# Altium PCB ATRACK_PILOT_V2.PcbDoc
Units mil, origin at the board's own origin, x right, y up, seen from the top; angles counter-clockwise.
Board outline 1732.28 x 1397.64 mil, 2 copper layers (Top Layer, Bottom Layer); 29 components, 25 nets, 106 pads, 26 vias.
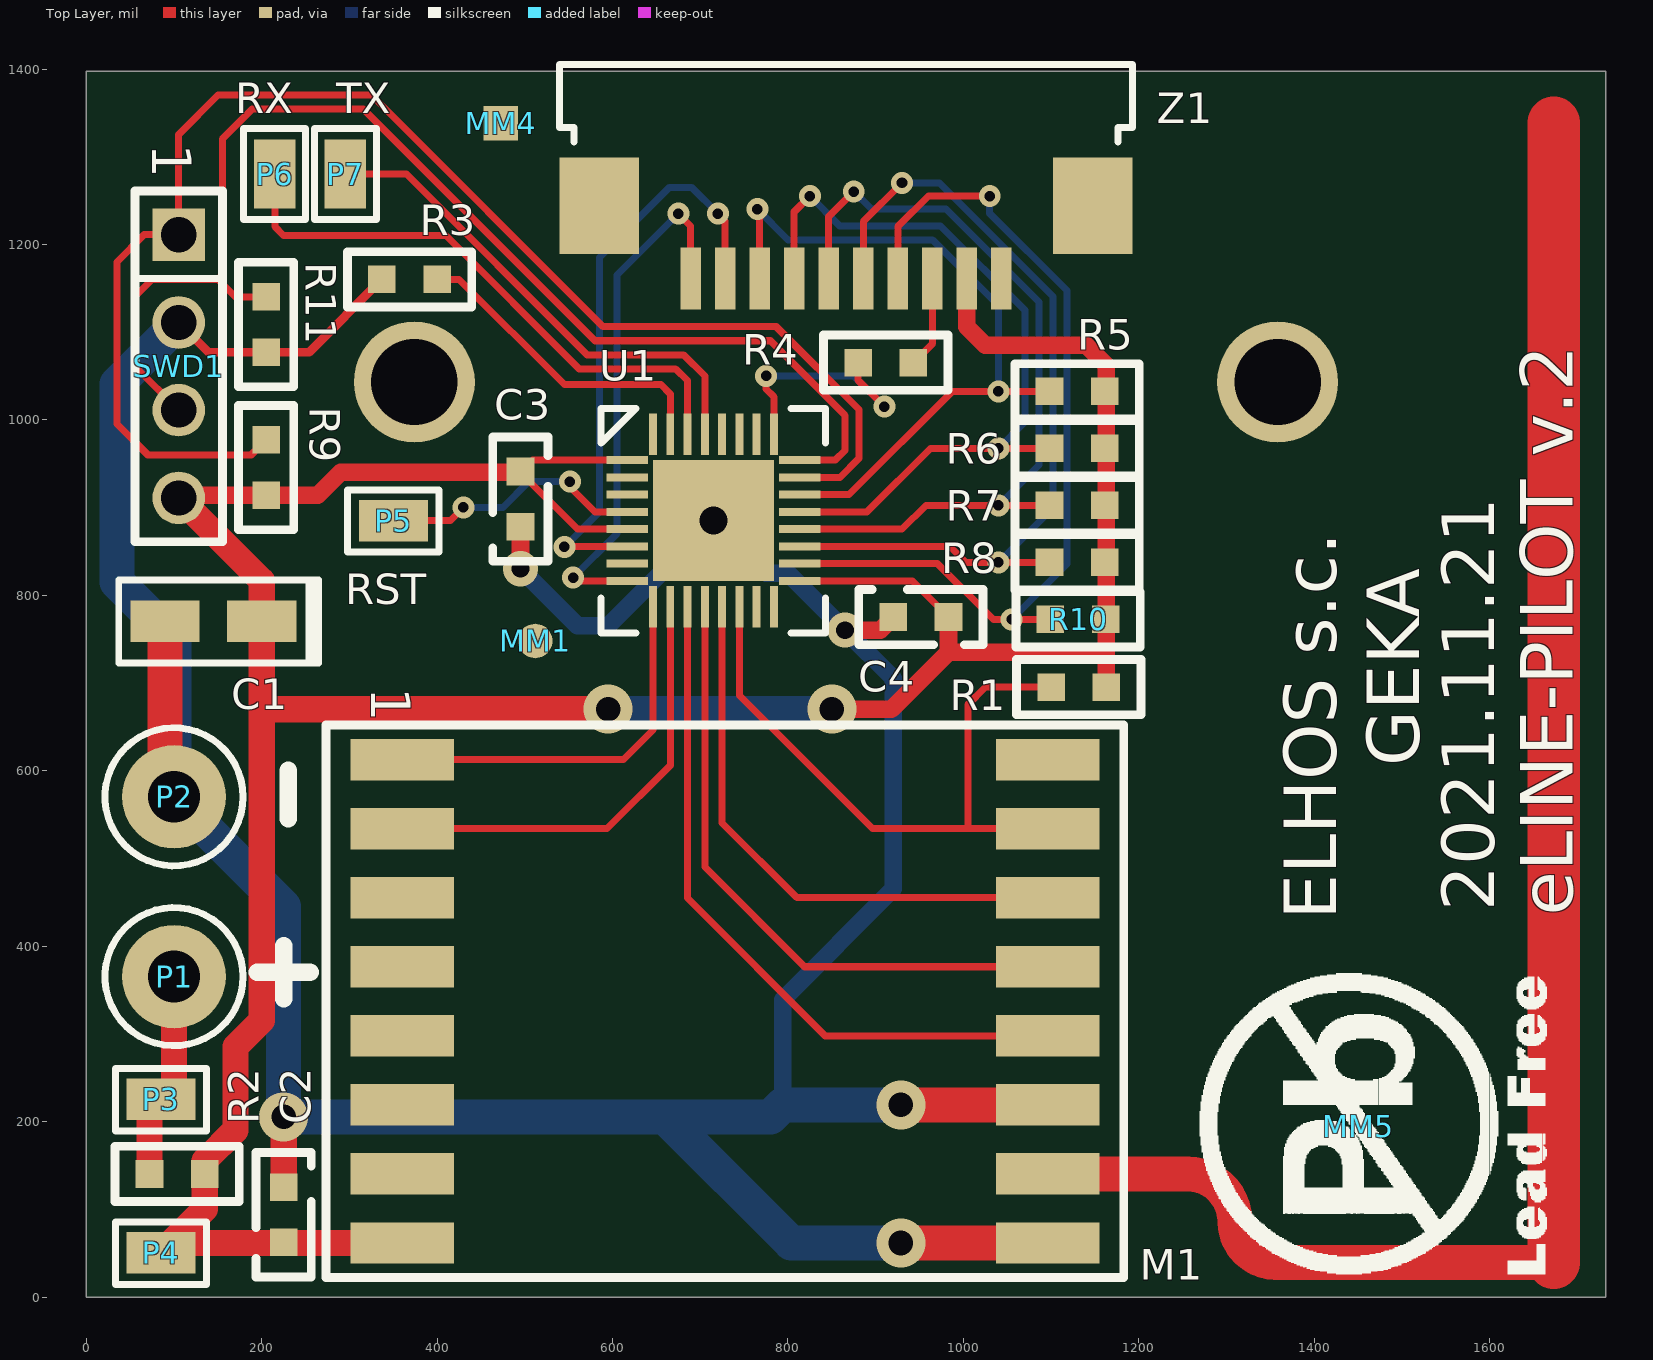
[diagram p0: Top Layer view]
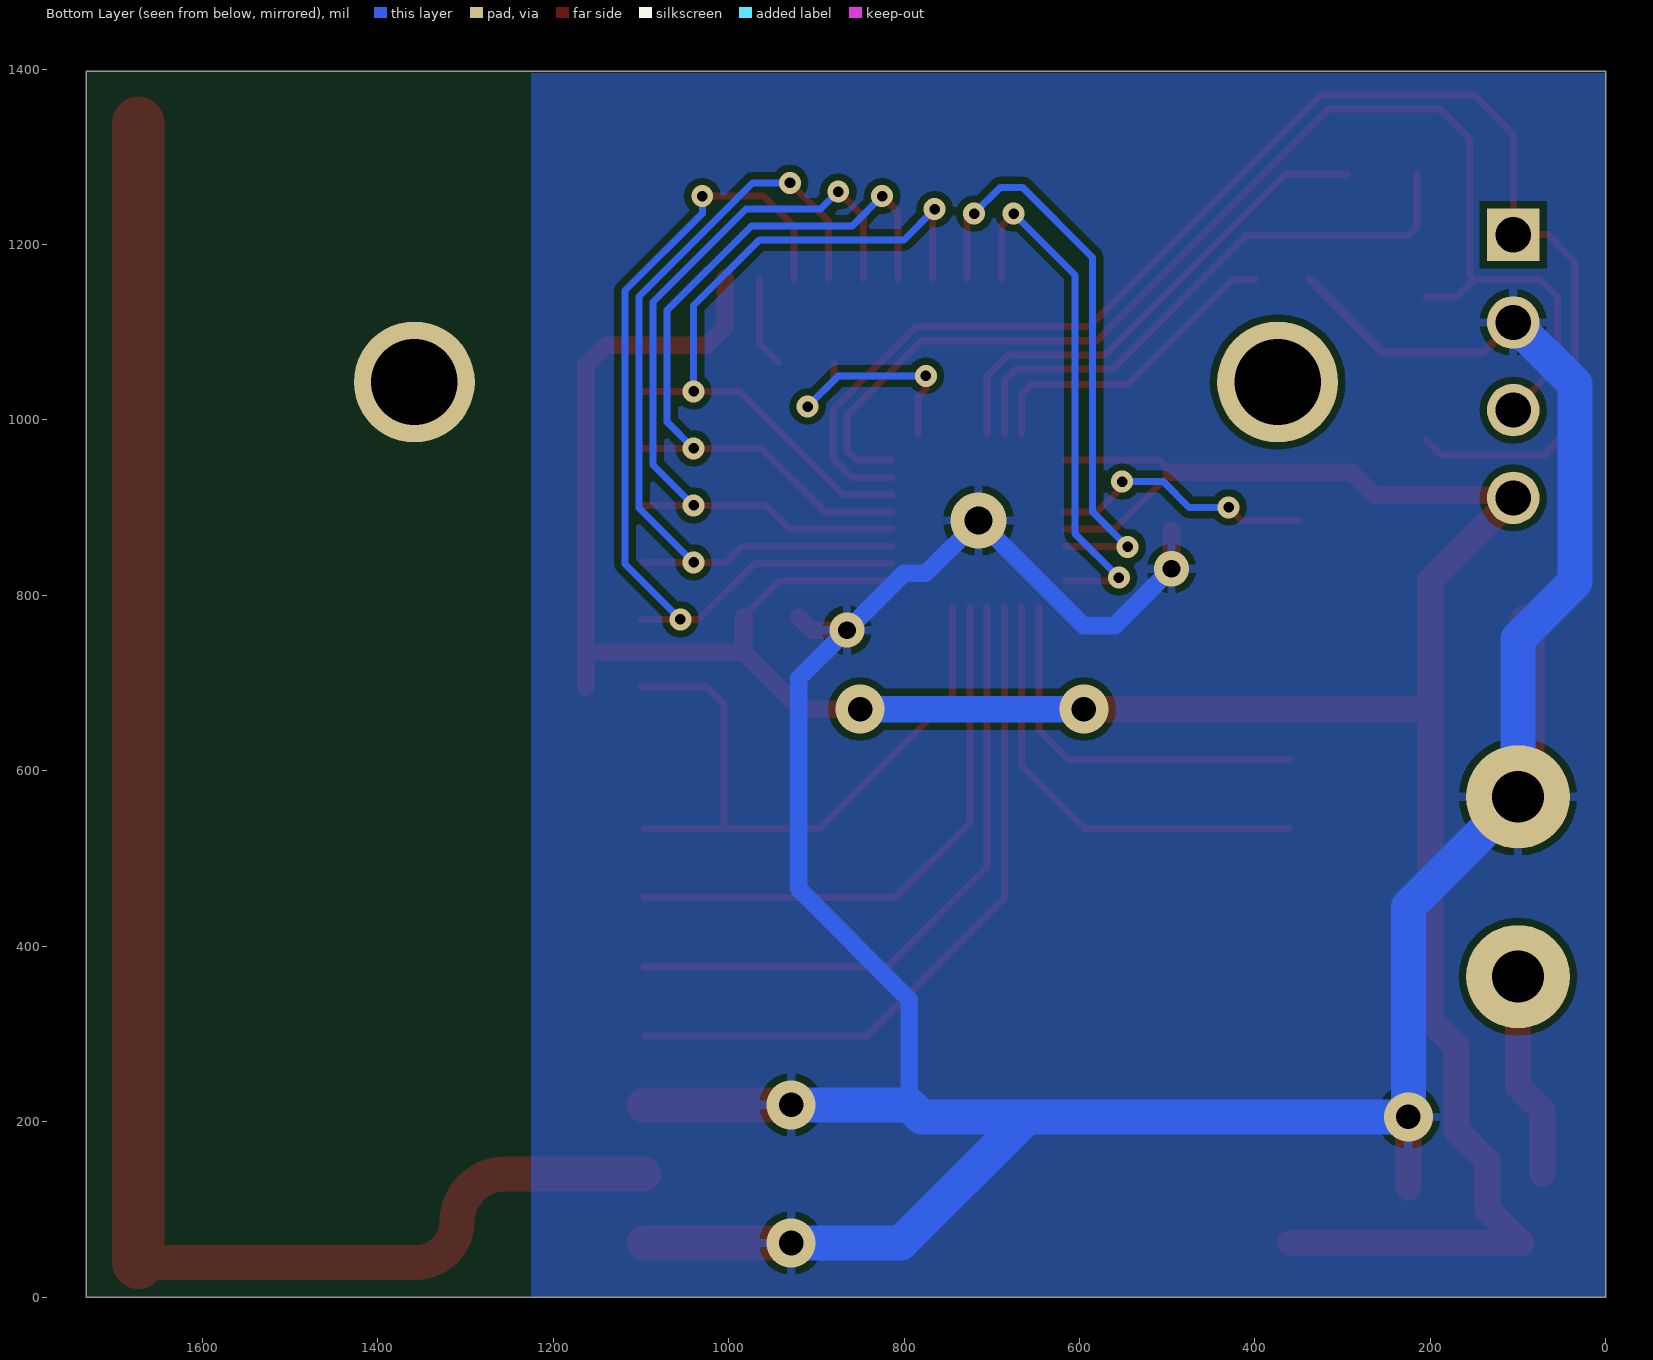
[diagram p1: Bottom Layer view, seen from below]

## Layer stack, top to bottom
Top Layer: signal copper 1.4
Dielectric: dielectric 12.6, FR-4, Dk 4.8
Bottom Layer: signal copper 1.4

## Board outline
0,0 0,1397.64 1732.28,1397.64 1732.28,0

## Design rules (kind name [scope] priority, off if disabled: settings)
Clearance [All] p1: gap=8
ComponentClearance [All] p1 off: gap=10 collisioncheckmode=3 verticalgap=10 showdistances=FALSE
HoleSize [All] p1: absolutevalues=TRUE maxlimit=157.48 minlimit=11.81 maxpercent=80.000 minpercent=20.000
MinimumSolderMaskSliver [All] p1: minsoldermaskwidth=4
PolygonConnect [All] p1: connectstyle=Relief reliefconductorwidth=10 reliefentries=4 polygonreliefangle="90 Angle"
RoutingVias [All] p1: holewidth=19.68 width=40 viastyle="Through Hole" minholewidth=11.81 minwidth=25 maxholewidth=78.74 maxwidth=200
SilkToSilkClearance [All] p1: silktosilkclearance=4
SilkscreenOverComponentPads [All] p1: minsilkscreentomaskgap=4
SolderMaskExpansion [All] p1: expansion=4
Width [All] p1: maxlimit=100 minlimit=8 preferedwidth=10 minimp=50.000000 maximp=50.000000 favimp=50.000000
23 further rules are at their usual default settings.

## Components (designator, comment, footprint, x,y, rotation, side; value= is the part's Value field where it differs from the comment)
C1 "10u/6.3V" CAP_A 89.76,770.35 r0 top
C2 "100n" 0603C 225,129.29 r90 top
C3 "100n" 0603C 495,874.29 r270 top
C4 "100n" 0603C 916.06,775.35 r180 top
M1 "RFM69W" RFM69W 340.32,22.28 r0 top locked
MM1 "" REF_CIR 511.81,748.03 r0 top
MM4 "" REF_SQR 472.44,1338.58 r0 top
MM5 "" PB_FREE_GRAF 1450,195 r90 top
P1 "PIN" PP_PICO6 100,365.35 r0 top
P2 "PIN" PP_PICO6 100,570.35 r0 top
P3 "PIN_M" PP_SMD1 85,225.35 r0 top
P4 "PIN_M" PP_SMD1 85,50.35 r0 top
P5 "PIN_M" PP_SMD1 350,885.35 r0 top
P6 "PIN_M" PP_SMD1 215,1280.35 r270 top
P7 "PIN_M" PP_SMD1 295,1280.35 r90 top
R1 "10k" 0603R 1096.06,695.35 r180 top
R2 "1R" 0603R 138.94,140.35 r0 top
R3 "10k" 0603R 333.07,1160.35 r180 top
R4 "1k" 0603R 876.06,1065.35 r180 top
R5 "100k" 0603R 1165.08,1032.64 r0 top
R6 "100k" 0603R 1165.08,967.64 r0 top
R7 "100k" 0603R 1165.08,902.64 r0 top
R8 "100k" 0603R 1165.08,837.64 r0 top
R9 "10k" 0603R 205,910.35 r270 top
R10 "100k" 0603R 1166.14,772.64 r0 top
R11 "10k" 0603R 205,1073.43 r270 top
SWD1 "ST-LINK" PIN4 105.35,1211.22 r270 top
U1 "STM32L031xx" UFQFPN32 616.57,983.78 r270 top
Z1 "Header 10" MX-52271-2079 688.98,1161.42 r0 top locked

## Footprints (in the part's own frame and the unit in brackets; to place one, negate y for a bottom-side part, rotate by r counter-clockwise, add the part's x,y. Pads: shape width x height; smd on the part's side, far side on the other; paste and mask are expansions set on the pad)
0603C [mm]
  rect 0.8x0.8 smd: 1(-0.1,0) 2(-1.7,0)
  silkscreen extent -2.7,-0.8 0.9,0.8
0603R [mm]
  rect 0.8x0.8 smd: 1(-0.1,0) 2(-1.7,0)
  silkscreen extent -2.7,-0.8 0.9,0.8
CAP_A [mm]
  rect 2x1.2 smd: 1(0,0) 2(2.8,0)
  silkscreen extent -1.34,-1.2 4.45,1.2
MX-52271-2079 [mm]
  rect 2.3x2.8 smd: 0(-2.65,2.1) 0(11.65,2.1)
  rect 0.6x1.8 smd: 1(0,0) 2(1,0) 3(2,0) 4(3,0) 5(4,0) 6(5,0) 7(6,0) 8(7,0) 9(8,0) 10(9,0)
  silkscreen extent -3.8,3.95 12.8,6.2
PB_FREE_GRAF [mil]
  silkscreen extent -169,-215 174,181
PIN4 [mil]
  rect 60x60 hole 40: 1(0,0)
  round 60 hole 40: 2(100,0) 3(200,0) 4(300,0)
  silkscreen extent -50,-50 350,50
PP_PICO6 [mm]
  round 3 hole 1.5: 1(0,0)
  silkscreen extent -2,-2 2,2
PP_SMD1 [mm]
  rect 2x1.2 smd: 1(0,0)
  silkscreen extent -1.32,-0.91 1.32,0.89
REF_CIR [mm]
  round 1 smd paste-0.5 mask+0.5: 0(0,0)
REF_SQR [mm]
  rect 1x1 smd paste-0.5 mask+0.5: ""(0,0)
RFM69W [mm]
  rect 3x1.2 smd: 1(0.5,15) 2(0.5,13) 3(0.5,11) 4(0.5,9) 5(0.5,7) 6(0.5,5) 7(0.5,3) 8(0.5,1) 9(19.2,1) 10(19.2,3) 11(19.2,5) 12(19.2,7) 13(19.2,9) 14(19.2,11) 15(19.2,13) 16(19.2,15)
  silkscreen extent -1.7,0 21.4,16
UFQFPN32 [mm]
  rect 0.23x1.2 smd mask+0.152: 1(0.75,0) 2(1.25,0) 3(1.75,0) 4(2.25,0) 5(2.75,0) 6(3.25,0) 7(3.75,0) 8(4.25,0) 17(4.25,5) 18(3.75,5) 19(3.25,5) 20(2.75,5) 21(2.25,5) 22(1.75,5) 23(1.25,5) 24(0.75,5)
  rect 1.2x0.23 smd mask+0.152: 9(5,0.75) 10(5,1.25) 11(5,1.75) 12(5,2.25) 13(5,2.75) 14(5,3.25) 15(5,3.75) 16(5,4.25) 25(0,4.25) 26(0,3.75) 27(0,3.25) 28(0,2.75) 29(0,2.25) 30(0,1.75) 31(0,1.25) 32(0,0.75)
  rect 3.5x3.5 smd mask+0.203: 33(2.5,2.5)
  silkscreen extent -0.75,-0.75 5.75,5.75

## Part data
C1: library part CAP_TANTAL_SMD, "KONDENSATOR ELEKTROLITYCZNY TANTALOWY SMD"
C2 C3 C4: library part CAP, "Capacitor"
M1: library part RFM96W
MM1 MM4 MM5: library part MECH
R1 R2 R3 R4 R5 R6 R7 R8 R9 R10 R11: library part RES3
SWD1: library part SW_CON, "Header, 4-Pin"
U1: library part STM32L031xx/UFQFPN32
Z1: "Header, 10-Pin"

## Free pads (board coordinates)
  round 137.8 hole 98.43: 0(374.02,1043.31) 1(1358.27,1043.31)

## Via types
v1: diameter 25, hole 12, Top Layer to Bottom Layer, tented both sides, 18 vias
v2: diameter 56, hole 28, Top Layer to Bottom Layer, tented both sides, 5 vias
v3: diameter 40, hole 20, Top Layer to Bottom Layer, tented both sides, 2 vias
v4: diameter 64, hole 32, Top Layer to Bottom Layer, tented both sides, 1 vias

## Nets (pads, with @x,y where several pads share a name; then routed paths per layer and width w, separated by ;. In a path a pad name is that pad's centre, name@x,y a point inside that pad or via, vN(x,y) a via of type N, cw(c..) or ccw(c..) an arc to the next point about the centre after c; other vN are vias at no path point)
#RST: P5.1 U1.4 | length 302.6
  Top Layer w8: P5.1 415,885.35 v1(430,900.35) ; v1(551.25,929.75) 555,926 555,920.35 580.16,895.2 U1.4
  Bottom Layer w8: v1(430,900.35) 475,900.35 504.4,929.75 v1(551.25,929.75)
ANT: M1.10 | length 1933.9
  Top Layer w40: M1.10 1255.57,140.39 cw(c1255.57,86.51) 1309.45,86.51 ccw(c1356.59,86.51) 1356.59,39.37 1673.23,39.37
  Top Layer w60: 1673.23,39.37 1673.23,1338.58
COL1: R5.2 U1.22 Z1.3 | length 831.8
  Top Layer w8: v1(765,1240.35) 767.72,1237.64 Z1.3 ; U1.22 869.53,914.88 987.28,1032.64 v1(1040,1032.64) R5.2
  Bottom Layer w8: v1(765,1240.35) 800,1205.35 965,1205.35 1040,1130.35 v1(1040,1032.64)
COL2: R6.2 U1.21 Z1.4 | length 885.1
  Top Layer w8: Z1.4 807.09,1237.44 v1(825,1255.35) ; U1.21 889.84,895.2 962.28,967.64 v1(1040,967.64) R6.2
  Bottom Layer w8: v1(825,1255.35) 859,1221.35 974,1221.35 1070,1125.35 1070,997.64 v1(1040,967.64)
COL3: R7.2 U1.20 Z1.5 | length 920.7
  Top Layer w8: U1.20 930.16,875.51 957.28,902.64 v1(1040,902.64) R7.2 ; Z1.5 846.46,1231.81 v1(875,1260.35)
  Bottom Layer w8: v1(875,1260.35) 895,1240.35 980,1240.35 1086,1134.35 1086,948.64 v1(1040,902.64)
COL4: R8.2 U1.19 Z1.6 | length 974.1
  Top Layer w8: U1.19 984.53,855.83 1002.72,837.64 v1(1040,837.64) R8.2 ; Z1.6 885.83,1226.18 v1(930,1270.35)
  Bottom Layer w8: v1(930,1270.35) 972.63,1270.35 1102,1140.98 1102,899.64 v1(1040,837.64)
COL5: R10.2 U1.18 Z1.7 | length 1035.7
  Top Layer w8: U1.18 970.67,836.14 1034.18,772.64 v1(1055,772.64) R10.2 ; Z1.7 925.2,1220.55 960,1255.35 v1(1030,1255.35)
  Bottom Layer w8: v1(1030,1255.35) 1030,1235.61 1118,1147.61 1118,835.64 v1(1055,772.64)
DRX: P6.1 U1.30 | length 664.3
  Top Layer w8: P6.1 215,1220.35 225,1210.35 410,1210.35 562,1058.35 672,1058.35 685.47,1044.88 U1.30
DTX: P7.1 U1.29 | length 571.9
  Top Layer w8: P7.1 365,1280.35 571,1074.35 681,1074.35 705.16,1050.2 U1.29
GND: C1.1 C2.1 C3.1 C4.1 M1.9 M1.11 P2.1 R3.1 R11.1 SWD1.2 U1.33 | length 4156.7
  Top Layer w10: SWD1.2 139.21,1077.36 R11.1 254.02,1077.36 R3.1
  Top Layer w20: v3@495,844.17 C3.1@495,874.29 ; v3(865,760.35) 905,760.35 C4.1
  Top Layer w30: C2.1 v2(225,205.35)
  Top Layer w40: C1.1 89.76,580.59 P2.1 ; v2(928.7,61.65) M1.9 ; v2(928.7,219.13) M1.11
  Bottom Layer w20: v3(495,830.35) 560,765.35 595,765.35 v4(715,885.35) 775,825.35 800,825.35 v3(865,760.35) 920,705.35 920,465.35 793.78,339.13 793.78,219.13
  Bottom Layer w40: SWD1.2 35,1040.87 35,815.35 100,750.35 P2.1 225,445.35 v2(225,205.35) 660,205.35 ; v2(928.7,61.65) 803.7,61.65 660,205.35 ; v2(928.7,219.13) 793.78,219.13 780,205.35 660,205.35
INT_R: M1.2 U1.10 | length 516.4
  Top Layer w8: M1.2 593.74,534.09 665.79,606.14 U1.10
LED1: R4.1 U1.25 | length 282.2
  Top Layer w8: v1(775,1050.35) 775,1035.35 783.9,1026.46 U1.25 ; R4.1 880,1045.35 v1(910,1015.35)
  Bottom Layer w8: v1(775,1050.35) 875,1050.35 v1(910,1015.35)
NetP1_1: P1.1 P3.1 R2.2 | length 236.6
  Top Layer w30: R2.2 72.01,212.36 P3.1 100,240.35 P1.1
NetR3_2: R3.2 U1.31 | length 365.7
  Top Layer w8: R3.2 425,1160.35 545,1040.35 655,1040.35 665.79,1029.57 U1.31
NetR4_2: R4.2 Z1.8 | length 105.4
  Top Layer w8: R4.2 965,1087.36 965,1160.98 Z1.8
RESET_R: M1.1 U1.9 | length 440.5
  Top Layer w8: M1.1 612.48,612.83 646.1,646.46 U1.9
ROW1: U1.6 Z1.2 | length 676.3
  Top Layer w8: v1(545,855.35) 545.47,855.83 U1.6 ; v1(720,1235.35) 728.35,1227.01 Z1.2
  Bottom Layer w8: v1(545,855.35) 585,895.35 585,1185.35 665,1265.35 690,1265.35 v1(720,1235.35)
ROW2: U1.8 Z1.1 | length 615.4
  Top Layer w8: v1(555,820.35) 551.1,816.46 U1.8 ; v1(675,1235.35) 688.98,1221.38 Z1.1
  Bottom Layer w8: v1(555,820.35) 605,870.35 605,1165.35 v1(675,1235.35)
SPI_CS: M1.15 R1.1 U1.14 | length 760.2
  Top Layer w8: U1.14 744.53,685.83 896.26,534.09 1005,534.09 ; M1.15 1005,534.09 ; R1.1 1025,695.35 1005,675.35 1005,534.09
SPI_MISO: M1.13 U1.12 | length 734.8
  Top Layer w8: U1.12 705.16,490.2 818.74,376.61 M1.13
SPI_MOSI: M1.14 U1.13 | length 653.1
  Top Layer w8: U1.13 724.84,540.51 810,455.35 M1.14
SPI_SCK: M1.12 U1.11 | length 807.8
  Top Layer w8: U1.11 685.47,454.88 842.48,297.87 M1.12
SWCLK: R11.2 SWD1.3 U1.24 | length 1443.4
  Top Layer w8: SWD1.3 55,1061.57 55,1140.35 75,1160.35 150,1160.35 ; R11.2 170,1140.35 150,1160.35 ; U1.24 853.9,954.25 865,965.35 865,1005.35 780,1090.35 580,1090.35 316,1354.35 189,1354.35 155,1320.35 155,1165.35 150,1160.35
SWDIO: R9.2 SWD1.1 U1.23 | length 1648.9
  Top Layer w8: R9.2 188.07,960.35 70,960.35 35,995.35 35,1180.35 65.87,1211.22 SWD1.1 105.35,1325.71 150,1370.35 325,1370.35 589,1106.35 786.63,1106.35 881,1011.98 881,956.35 859.21,934.57 U1.23
VC3: C1.2 C2.2 C3.2 C4.2 M1.8 P4.1 R1.2 R2.1 R5.1 R6.1 R7.1 R8.1 R9.1 R10.1 SWD1.4 U1.1 U1.5 U1.17 Z1.9 | length 3689.6
  Top Layer w8: C3.2 C3.2@495,940.35 ; U1.5 559.84,875.51 C3.2@495,940.35 ; U1.1 508.9,954.25 C3.2@495,940.35 ; U1.17 941.89,816.46 C4.2
  Top Layer w20: SWD1.4 108.43,914.29 R9.1 263.94,914.29 290,940.35 C3.2@495,940.35 ; v2(850,670.35) 917.99,670.35 982.99,735.35 ; C4.2 982.99,735.35 ; Z1.9 1003.94,1106.42 1025,1085.35 1140,1085.35 1162.99,1062.36 1162.99,967.64 1162.99,735.35 ; R1.2 1162.99,735.35 ; 982.99,735.35 1162.99,735.35
  Top Layer w30: SWD1.4 200,816.57 C1.2 200,670.35 ; M1.8 96.3,61.65 135,100.35 R2.1 135,155.35 170,190.35 170,285.35 200,315.35 200,670.35 ; v2(595,670.35) 200,670.35
  Bottom Layer w30: v2(595,670.35) v2(850,670.35)
pads on no net: M1.3 M1.4 M1.5 M1.6 M1.7 M1.16 MM1.0 MM4. U1.2 U1.3 U1.7 U1.15 U1.16 U1.26 U1.27 U1.28 U1.32 Z1.0 Z1.10

## Polygon pours and split planes (outlines as drawn)
GND on Bottom Layer "GND_Poly" (solid, remove dead copper, pour order 2): 1225,1395.35 1225,0.35 0,0.35 0,1395.35

## Silkscreen, mask and mechanical layers (free items; w line width, h text height)
Top Overlay:
  lines w20: 195,370.35 255,370.35 ; 225,340.35 225,400.35 ; 230,545.35 230,600.35
  text "RX" at 170,1350 h35
  text "TX" at 285,1350 h35
  text "1" at 75,1315 h45 r270
  text "RST" at 295,790 h35
  text "GEKA" at 1520,605 h60 r90
  text "2021.11.21" at 1605,440 h60 r90
  text "eLINE-PILOT v.2" at 1695,435 h60 r90
  text "ELHOS s.c." at 1425,430 h60 r90
Mechanical 1:
  the board outline again, w8

## Text inside footprints (layer, text, board x,y; h text height)
M1: Top Overlay "1" at 325,695.35 h45 r270